# Altium PCB ESP32-HWE.PcbDoc
Units mil, origin at the board's own origin, x right, y up, seen from the top; angles counter-clockwise.
Board outline 1950 x 1185 mil, 2 copper layers (Top Layer, Bottom Layer), stack 61.811 mil thick; 31 components, 46 nets, 217 pads, 31 vias.
Unrouted connection lines stored in the file: 35.
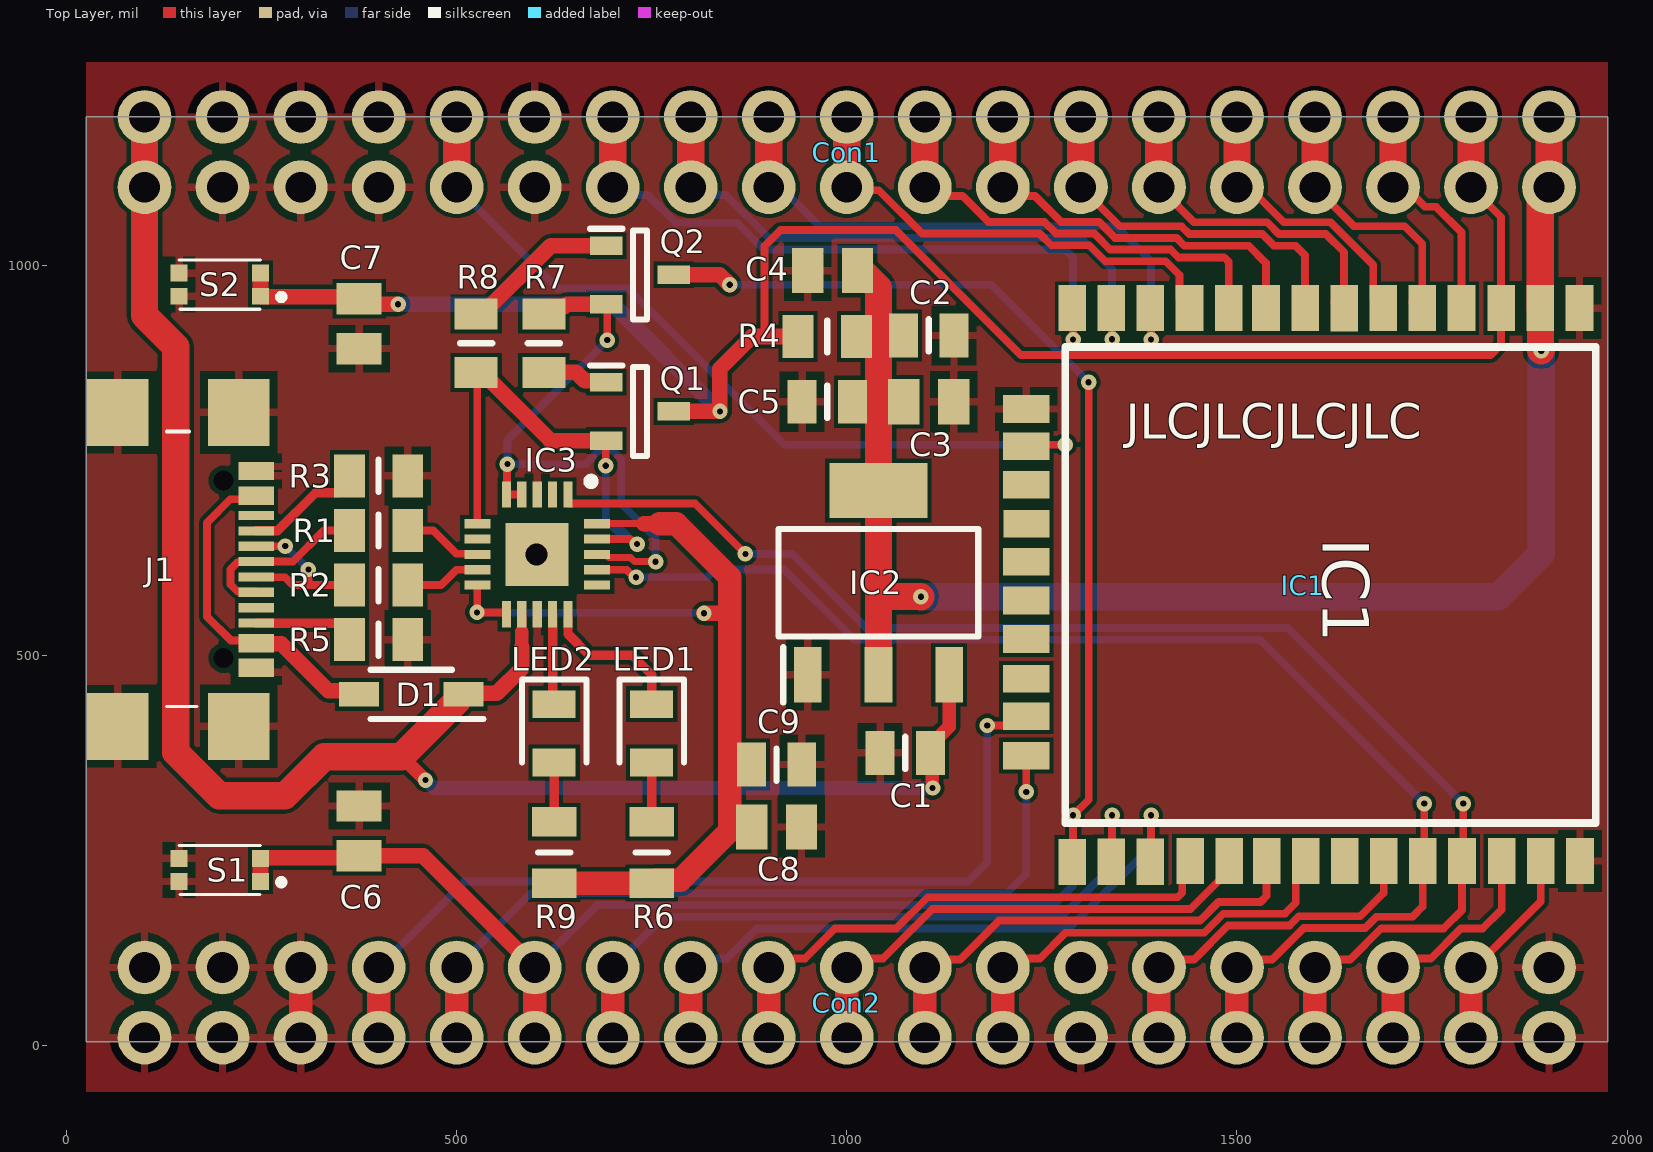
[diagram p0: Top Layer view]
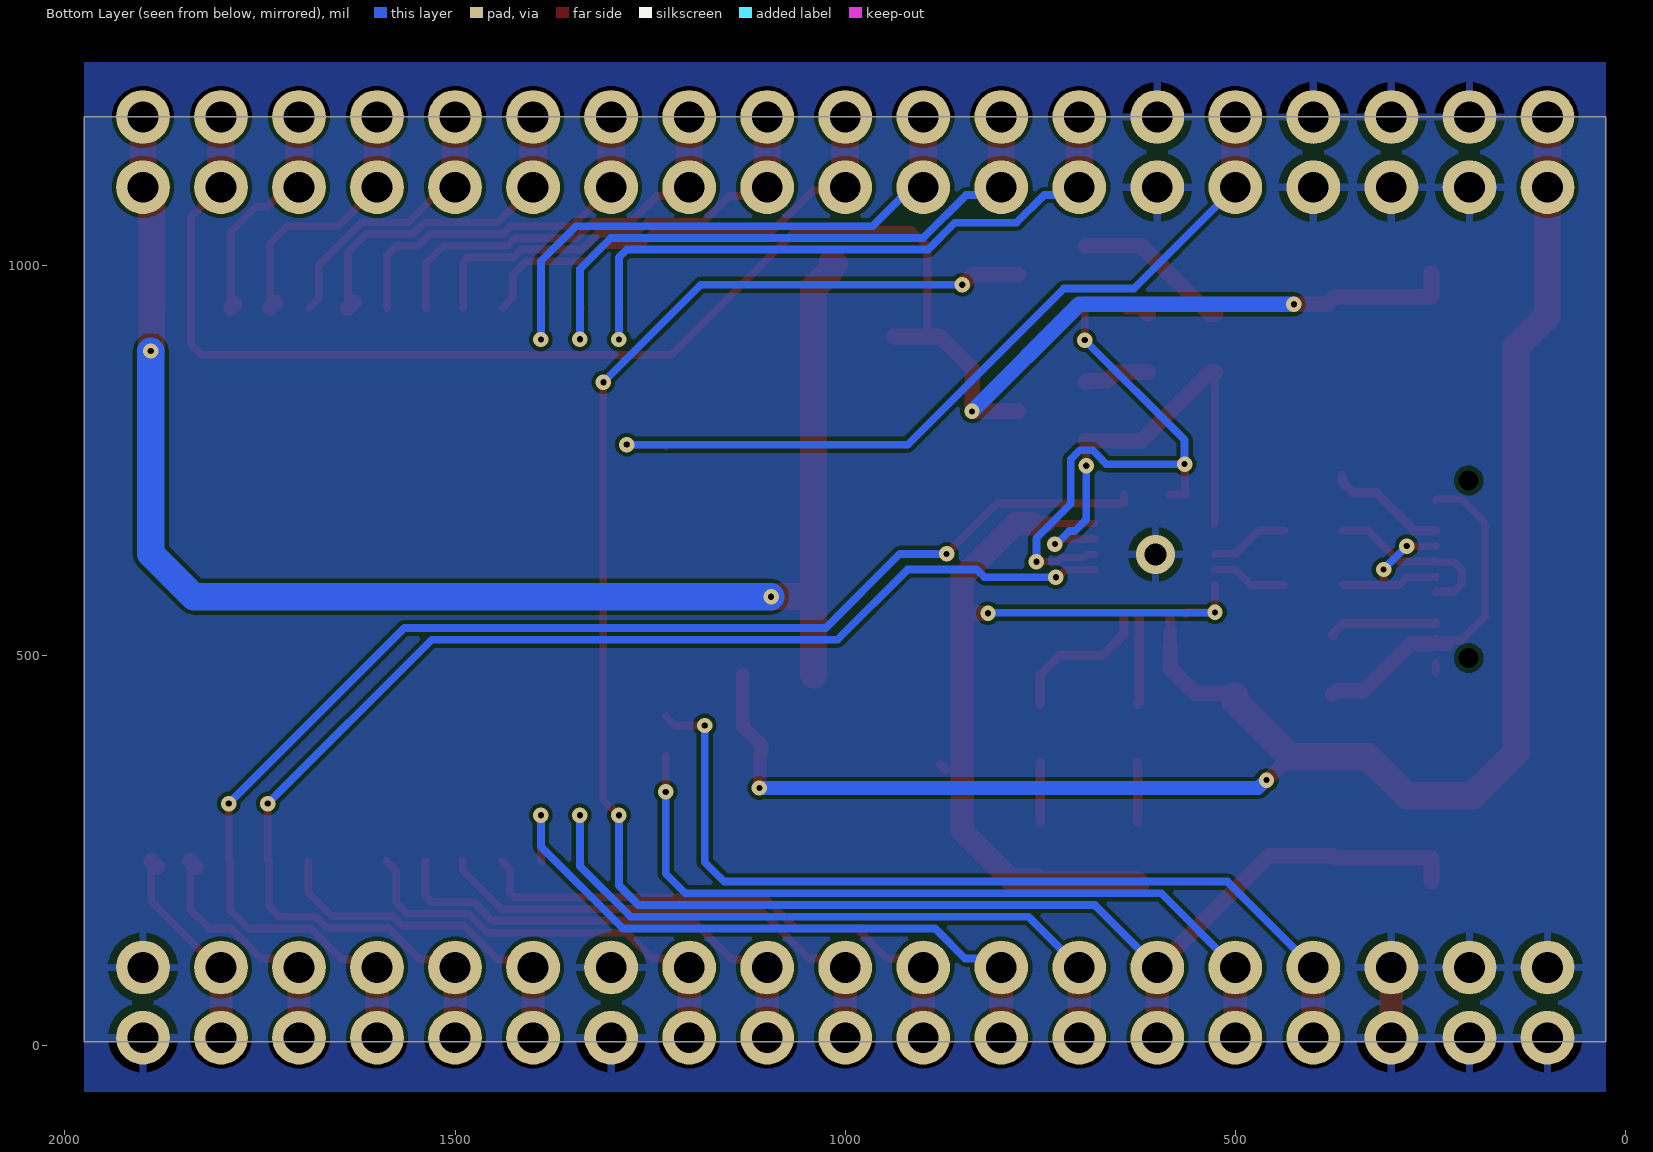
[diagram p1: Bottom Layer view, seen from below]
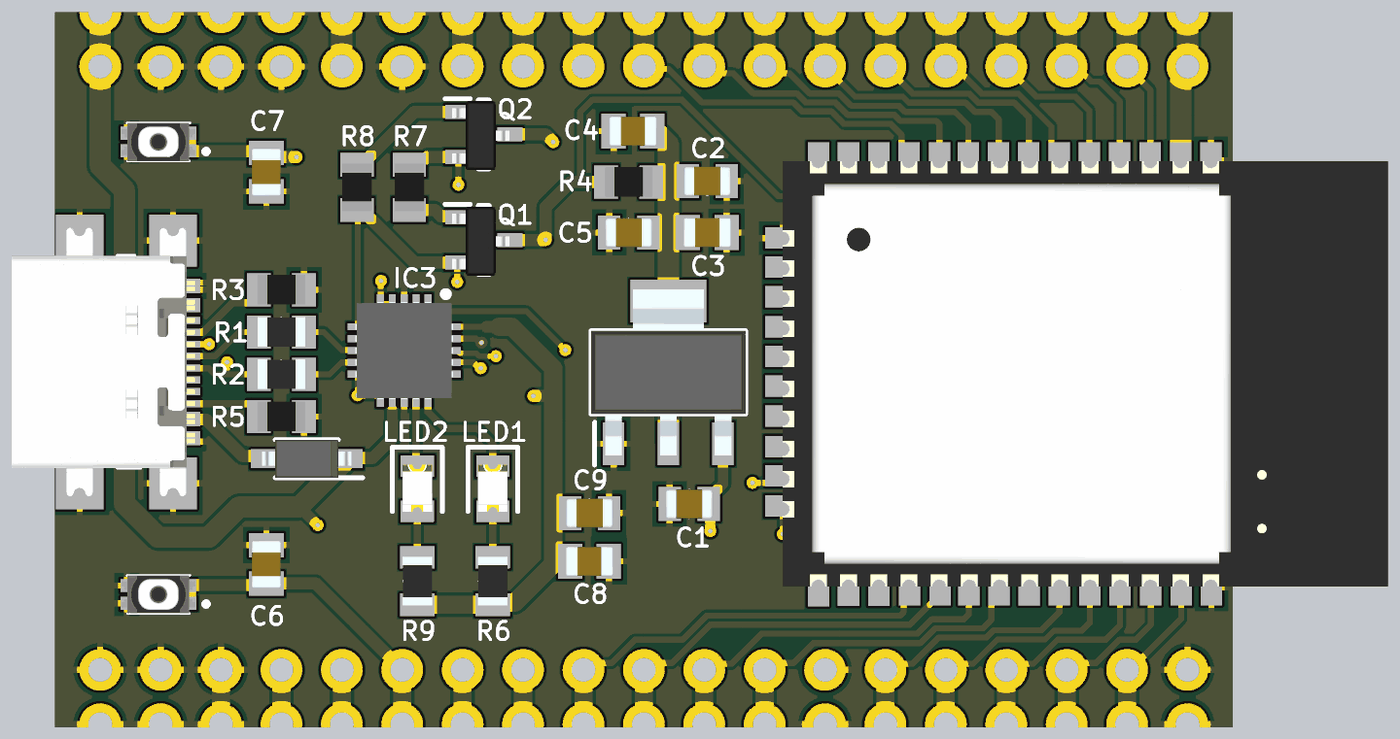
[diagram p2: 3D render of the assembled board from above, using the file's embedded part models]

## Layer stack, top to bottom
Top Solder: solder mask 1, SM-002, Dk 4
Top Layer: signal copper 1.378
Dielectric: core 59.0551, FR-4, Dk 4.5
Bottom Layer: signal copper 1.378
Bottom Solder: solder mask 1, SM-002, Dk 4

## Board outline
25,5 1975,5 1975,1190 25,1190 25,780 25,420

## Design rules (kind name [scope] priority, off if disabled: settings)
Clearance Clearance_1 [All] p1: gap=5 ignorepadtopadclearanceinfootprint=FALSE except(5.91: Arc-Text Arc-Hole Track-Text Track-Hole SMDPad-Text SMDPad-Hole THPad-Text THPad-Hole Via-Text Via-Hole Fill-Text Fill-Hole Poly-Text Poly-Hole Region-Text Region-Hole Text-Text Text-Hole)
Clearance Clearance_D90 [All] p2: gap=0 ignorepadtopadclearanceinfootprint=TRUE
DiffPairsRouting [InDifferentialPair('D')] p1: maxlimit=5 minlimit=5 mostfreqgap=5 toplayer_minwidth=14.4 toplayer_maxwidth=14.4 toplayer_prefwidth=14.4 bottomlayer_minwidth=14.4 bottomlayer_maxwidth=14.4 bottomlayer_prefwidth=14.4 impedanceprofiledriven=TRUE impedanceprofileid={4D5844AF-7548-43E8-93FF-88B9F99C0680} impedanceprofilevalue=90.000000 maxuncoupledlength=500
MinimumSolderMaskSliver [All] p1: minsoldermaskwidth=0
PolygonConnect [All] p1: connectstyle=Relief reliefconductorwidth=10 reliefentries=4 polygonreliefangle="90 Angle" airgapwidth=10
RoutingVias [All] p1: holewidth=7.87 width=19.68 viastyle="Through Hole" minholewidth=7.87 minwidth=19.68 maxholewidth=39.37 maxwidth=78.74
SilkToSilkClearance [All] p1: silktosilkclearance=0
SilkToSolderMaskClearance [IsPad] p1: minsilkscreentomaskgap=0 clearancetoexposedcopper=TRUE
SolderMaskExpansion [All] p1: expansion=4 istentingtop=FALSE
Width [All] p1: maxlimit=50 minlimit=5 preferedwidth=10
26 further rules are at their usual default settings.

## Components (designator, comment, footprint, x,y, rotation, side; value= is the part's Value field where it differs from the comment)
C1 "10uF" CAPC2012X140N 1075,375 r180 top
C2 "10uF" CAPC2012X140N 1105,910 r0 top
C3 "0.1uF" CAPC2012X94N 1105,825 r0 top
C4 "0.1uF" CAPC2012X94N 981.89,993.05 r180 top
C5 "10uF" CAPC2012X140N 975,825 r180 top
C6 "0.1uF" CAPC2012X94N 375,275 r90 top
C7 "0.1uF" CAPC2012X94N 375,925 r270 top
C8 "0.1uF" CAPC2012X94N 910,280 r0 top
C9 "10uF" CAPC2012X140N 910,360 r0 top
Con1 "19Pol" Header_19-Double 100,1190 r270 top
Con2 "19Pol" Header_19-Double 100,100 r270 top
D1 "SS0540_R1_00001" SOD3816X135N 441.93,450 r180 top
IC1 "ESP32" ESP-WRC 1230,945 r270 top locked
IC2 "AP7361C-33ER-13" SOT230P700X180-4N 1040.55,593.11 r90 top
IC3 "FT231XQ-T" QFN50P400X400X80-21N 603.23,629.37 r270 top
J1 "USB4110-GF-A" USB4110GFA 98.43,610.24 r270 top locked
LED1 "150080YS75000" LEDC2012X80N 750,400 r270 top
LED2 "150080YS75000" LEDC2012X80N 625,400 r270 top
Q1 "PMBT3904,235" SOT95P230X110-3N 734.98,812.6 r0 top
Q2 "PMBT3904,235" SOT95P230X110-3N 734.98,987.6 r0 top
R1 "27R" RESC2012X65N 400,660 r180 top
R2 "27R" RESC2012X65N 400,590 r180 top
R3 "5k1" RESC2012X60N 400,730 r0 top
R4 "10k" RESC2012X60N 975,908.63 r180 top
R5 "5k1" RESC2012X60N 400,520 r0 top
R6 "200R" RESC2012X50N 750,247.27 r270 top
R7 "10k" RESC2012X60N 611.78,900 r270 top
R8 "10k" RESC2012X60N 525,900 r90 top
R9 "200R" RESC2012X50N 625,247.27 r90 top
S1 "EVP-BB2A9B000" EVPBB2A9B000 206.3,225 r180 top
S2 "EVP-BB2A9B000" EVPBB2A9B000 206.3,975 r180 top

## Footprints (in the part's own frame and the unit in brackets; to place one, negate y for a bottom-side part, rotate by r counter-clockwise, add the part's x,y. Pads: shape width x height; smd on the part's side, far side on the other; paste and mask are expansions set on the pad)
CAPC2012X94N [mm]
  rect 1.02x1.47 smd: 1(-0.81,0) 2(0.81,0)
  body extent -1,-0.63 1,0.63, height 0.94
CAPC2012X140N [mm]
  rect 0.94x1.43 smd: 1(-0.82,0) 2(0.82,0)
  silkscreen extent 0,-0.53 0,0.53, body extent -1,-0.63 1,0.63, height 1.4
ESP-WRC [mm]
  rect 1.5x0.9 smd: 3V3_1(0,16.733) EN(0,15.458) GND_1(0,18.008) GND_3(18,18.026) IO_00(18.036,1.5) IO_04(18.024,2.764) IO_05(18,6.609) IO_12(0,1.5) IO_14(0,2.764) IO_16(18.024,4.04) IO_17(18,5.333) IO_18(18,7.825) IO_19(18,9.095) IO_21(18,11.635) IO_22(18,15.476) IO_23(18,16.751) IO_25(0,6.59) IO_26(0,5.315) IO_27(0,4.04) IO_32(0,9.076) IO_33(0,7.806) IO_34(0,11.617) IO_35(0.004,10.346) NC(18.004,10.365) RXD0(18,12.91) Sensor_VN(0,12.892) Sensor_VP(0,14.167) TXD0(18,14.185)
  rect 0.9x1.5 smd: GND_2(3.285,0) IO_02(14.57,0) IO_13(4.494,0) IO_15(13.283,0) NC_1(5.752,0) NC_2(7.022,0.003) NC_3(8.255,0) NC_4(9.517,0) NC_5(10.774,0) NC_6(12.065,0)
  silkscreen extent 1.27,1.27 16.76,18.54, body extent 0.05,-0.01 17.95,25.45, height 2.6
EVPBB2A9B000 [mm]
  rect 0.55x0.55 smd: 1(-1.075,0.375) 2(-1.075,-0.375) 3(1.575,-0.375) 4(1.575,0.375)
  silkscreen extent -1.85,-0.8 1.58,0.8, body extent -1.3,-0.8 1.8,0.8, height 0.56
Header_19-Double [mm] "19 Polig"
  round 1.75 hole 1: 1(0,45.72) 1(2.286,45.72) 2(0,43.18) 2(2.286,43.18) 3(0,40.64) 3(2.286,40.64) 4(0,38.1) 4(2.286,38.1) 5(0,35.56) 5(2.286,35.56) 6(0,33.02) 6(2.286,33.02) 7(0,30.48) 7(2.286,30.48) 8(0,27.94) 8(2.286,27.94) 9(0,25.4) 9(2.286,25.4) 10(0,22.86) 10(2.286,22.86) 11(0,20.32) 11(2.286,20.32) 12(0,17.78) 12(2.286,17.78) 13(0,15.24) 13(2.286,15.24) 14(0,12.7) 14(2.286,12.7) 15(0,10.16) 15(2.286,10.16) 16(0,7.62) 16(2.286,7.62) 17(0,5.08) 17(2.286,5.08) 18(0,2.54) 18(2.286,2.54) 19(0,0) 19(2.286,0)
LEDC2012X80N [mm]
  rect 0.9x1.4 smd: 1(-0.95,0) 2(0.95,0)
  silkscreen extent -1.75,-1.05 0.95,1.05, body extent -1.03,-0.63 0.97,0.63, height 0.7
QFN50P400X400X80-21N [mm]
  rect 0.85x0.3 smd: 1(-1.95,1) 2(-1.95,0.5) 3(-1.95,0) 4(-1.95,-0.5) 5(-1.95,-1) 11(1.95,-1) 12(1.95,-0.5) 13(1.95,0) 14(1.95,0.5) 15(1.95,1)
  rect 0.3x0.85 smd: 6(-1,-1.95) 7(-0.5,-1.95) 8(0,-1.95) 9(0.5,-1.95) 10(1,-1.95) 16(1,1.95) 17(0.5,1.95) 18(0,1.95) 19(-0.5,1.95) 20(-1,1.95)
  rect 2.05x2.05 smd: 21(0,0)
  silkscreen extent -2.5,1.63 -2.25,1.88, body extent -2.05,-2.05 2.05,2.05, height 0.8
RESC2012X50N [mm]
  rect 0.95x1.45 smd: 1(-1,0) 2(1,0)
  silkscreen extent 0,-0.53 0,0.53, body extent -1.02,-0.63 1.02,0.63, height 0.5
RESC2012X60N [mm]
  rect 1x1.4 smd: 1(-0.95,0) 2(0.95,0)
  silkscreen extent 0,-0.53 0,0.53, body extent -1,-0.63 1,0.63, height 0.5
RESC2012X65N [mm]
  rect 1x1.4 smd: 1(-0.95,0) 2(0.95,0)
  silkscreen extent 0,-0.53 0,0.53, body extent -1,-0.63 1,0.63, height 0.65
SOD3816X135N [mm]
  rect 1.3x0.8 smd: 1(-1.7,0) 2(1.7,0)
  silkscreen extent -2.35,-0.8 1.33,0.8, body extent -1.88,-0.8 1.88,0.8, height 1.35
SOT95P230X110-3N [mm]
  rect 1.05x0.6 smd: 1(-1.1,0.95) 2(-1.1,-0.95) 3(1.1,0)
  silkscreen extent -1.63,-1.45 0.23,1.5, body extent -1.33,-1.5 1.07,1.4, height 0.95
SOT230P700X180-4N [mm]
  rect 1.8x0.9 smd: 1(-3,2.3) 2(-3,0) 3(-3,-2.3)
  rect 1.8x3.2 smd: 4(3,0)
  silkscreen extent -3.9,-3.25 1.75,3.25, body extent -3.5,-3.25 3.5,3.25, height 1.8
USB4110GFA [mm]
  rect 0.3x1.15 smd: A1(-3.35,3.678) A4(-2.55,3.678) A5(-1.25,3.678) A6(-0.25,3.678) A7(0.25,3.678) A8(1.25,3.678) A9(2.55,3.678) A12(3.35,3.678) B1(3.05,3.678) B4(2.25,3.678) B5(1.75,3.678) B6(0.75,3.678) B7(-0.75,3.678) B8(-1.75,3.678) B9(-2.25,3.678) B12(-3.05,3.678)
  round 0.325 hole 0.65 unplated: MH1(-2.89,2.603) MH2(2.89,2.603)
  rect 2.18x2 smd: MP1(-5.11,-0.827) MP2(5.11,-0.827) MP3(-5.11,3.103) MP4(5.11,3.103)
  silkscreen extent -4.5,0.75 4.47,1.75, body extent -5.65,-3.68 5.65,4.02, height 3.26

## Part data
C1 C2 C5 C9: library part CL21A106KOQNNNG, "Capacitor", Manufacturer_Name="Samsung Electro-Mechanics", Mouser Part Number=187-CL21A106KOQNNNG, Arrow Part Number=CL21A106KOQNNNG, Arrow Price/Stock=https://www.arrow.com/en/products/cl21a106koqnnng/samsung-electro-mechanics?region=nac, Datasheet Link=http://uk.rs-online.com/web/p/products/7665639, Height=1.4mm, Manufacturer_Part_Number=CL21A106KOQNNNG, Mouser Price/Stock=https://www.mouser.co.uk/ProductDetail/Samsung-Electro-Mechanics/CL21A106KOQNNNG?qs=hqM3L16%252BxlcMWI7QbqH0LA%3D%3D
C3 C4 C6 C7 C8: library part 08055C104KAT2A, "Capacitor", Manufacturer_Name=AVX, Mouser Part Number=581-08055C104K, Arrow Part Number=08055C104KAT2A, Arrow Price/Stock=https://www.arrow.com/en/products/08055c104kat2a/avx, Datasheet Link=http://datasheets.avx.com/X7RDielectric.pdf, Height=0.94mm, Manufacturer_Part_Number=08055C104KAT2A, Mouser Price/Stock=https://www.mouser.co.uk/ProductDetail/AVX/08055C104KAT2A?qs=2ujN4bDBNE9mJvapP%252BjopA%3D%3D
Con1 Con2: library part Header_19_Double
D1: "Schottky Diode", Manufacturer_Name=PANJIT, Mouser Part Number=241-SS0540_R1_00001, Datasheet Link=https://www.panjit.com.tw/upload/datasheet/SS0520_SERIES.pdf, Height=1.35mm, Manufacturer_Part_Number=SS0540_R1_00001, Mouser Price/Stock=https://www.mouser.co.uk/ProductDetail/Panjit/SS0540_R1_00001?qs=sPbYRqrBIVn%2F%252BqoXj%2F1rpw%3D%3D
IC1: library part ESP32-WROOM-32E-N16, Manufacturer="Espressif Systems", Category=Uncategorized, Manufacturer Part Number=ESP32-WROOM-32E-N16, Pricing 1="1=3,60000 (USD)", RoHS=No, Stock 1=11805, Supplier 1=Digi-Key
IC2: "Integrated Circuit", Manufacturer_Name="Diodes Inc.", Mouser Part Number=621-AP7361C-33ER-13, Arrow Part Number=AP7361C-33ER-13, Arrow Price/Stock=https://www.arrow.com/en/products/ap7361c-33er-13/diodes-incorporated, Datasheet Link=https://componentsearchengine.com/Datasheets/1/AP7361C-33ER-13.pdf, Height=1.8mm, Manufacturer_Part_Number=AP7361C-33ER-13, Mouser Price/Stock=https://www.mouser.co.uk/ProductDetail/Diodes-Incorporated/AP7361C-33ER-13?qs=60RJRzIpcl8A1pMqYmc7oA%3D%3D
IC3: "Integrated Circuit", Manufacturer_Name="FTDI Chip", Mouser Part Number=895-FT231XQ-T, Arrow Part Number=FT231XQ-T, Arrow Price/Stock=https://www.arrow.com/en/products/ft231xq-t/ftdi-chip?region=nac, Datasheet Link=http://www.ftdichip.com/Support/Documents/DataSheets/ICs/DS_FT231X.pdf, Height=0.8mm, Manufacturer_Part_Number=FT231XQ-T, Mouser Price/Stock=https://www.mouser.co.uk/ProductDetail/FTDI/FT231XQ-T?qs=Gp1Yz1mis3WBwU6V7%2FJOkg%3D%3D
J1: "Connector", Manufacturer_Name="GCT (GLOBAL CONNECTOR TECHNOLOGY)", Mouser Part Number=640-USB4110-GF-A, Datasheet Link=https://gct.co/files/drawings/usb4110.pdf, Height=3.26mm, Manufacturer_Part_Number=USB4110-GF-A, Mouser Price/Stock=https://www.mouser.co.uk/ProductDetail/GCT/USB4110-GF-A?qs=KUoIvG%2F9IlYiZvIXQjyJeA%3D%3D
LED1 LED2: "LED", Manufacturer_Name="Wurth Elektronik", Mouser Part Number=710-150080YS75000, Datasheet Link=https://katalog.we-online.de/led/datasheet/150080YS75000.pdf, Height=0.8mm, Manufacturer_Part_Number=150080YS75000, Mouser Price/Stock=https://www.mouser.co.uk/ProductDetail/Wurth-Elektronik/150080YS75000?qs=LlUlMxKIyB3k0fZGrDMI2w%3D%3D
Q1 Q2: "Transistor BJT NPN", Manufacturer_Name=Nexperia, Mouser Part Number=771-PMBT3904235, Arrow Part Number=PMBT3904,235, Arrow Price/Stock=https://www.arrow.com/en/products/pmbt3904235/nexperia?region=nac, Datasheet Link=https://assets.nexperia.com/documents/data-sheet/PMBT3904.pdf, Height=1.1mm, Manufacturer_Part_Number=PMBT3904,235, Mouser Price/Stock=https://www.mouser.co.uk/ProductDetail/Nexperia/PMBT3904235?qs=LOCUfHb8d9uziIfl4fmvZg%3D%3D
R1 R2: library part SFR10EZPF27R0, "Resistor", Manufacturer_Name="ROHM Semiconductor", Mouser Part Number=755-SFR10EZPF27R0, Datasheet Link=https://fscdn.rohm.com/en/products/databook/datasheet/passive/resistor/chip_resistor/sfr-e.pdf, Height=0.65mm, Manufacturer_Part_Number=SFR10EZPF27R0, Mouser Price/Stock=https://www.mouser.co.uk/ProductDetail/ROHM-Semiconductor/SFR10EZPF27R0?qs=Y0Uzf4wQF3lFQtDGyGx0xw%3D%3D
R3 R5: library part CR0805-JW-512ELF, "Resistor", Manufacturer_Name=Bourns, Mouser Part Number=652-CR0805JW-512ELF, Datasheet Link=https://www.bourns.com/pdfs/chpreztr.pdf, Height=0.6mm, Manufacturer_Part_Number=CR0805-JW-512ELF
R4 R7 R8: library part RC0805FR-1010KL, "Resistor", Manufacturer_Name=KEMET, Mouser Part Number=603-RC0805FR-1010KL, Arrow Part Number=RC0805FR-1010KL, Arrow Price/Stock=https://www.arrow.com/en/products/rc0805fr-1010kl/yageo, Datasheet Link=https://datasheet.datasheetarchive.com/originals/distributors/Datasheets_SAMA/902f9e387b938f871d31120f5fc1d65e.pdf, Height=0.6mm, Manufacturer_Part_Number=RC0805FR-1010KL, Mouser Price/Stock=https://www.mouser.co.uk/ProductDetail/YAGEO/RC0805FR-1010KL?qs=g6xwsc4j%252B%2Fp3VghNFTJwLg%3D%3D
R6 R9: library part CRCW0805200RJNEA, "Resistor", Manufacturer_Name=Vishay, Mouser Part Number=71-CRCW0805200RJNEA, Arrow Part Number=CRCW0805200RJNEA, Arrow Price/Stock=https://www.arrow.com/en/products/crcw0805200rjnea/vishay, Datasheet Link=http://www.vishay.com/docs/20035/dcrcwe3.pdf, Height=0.5mm, Manufacturer_Part_Number=CRCW0805200RJNEA, Mouser Price/Stock=https://www.mouser.co.uk/ProductDetail/Vishay-Dale/CRCW0805200RJNEA?qs=t6Mf8e9K%2FulaYQcj5GyGqg%3D%3D
S1 S2: "Switch", Manufacturer_Name=Panasonic, Mouser Part Number=667-EVP-BB2A9B000, Arrow Part Number=EVP-BB2A9B000, Arrow Price/Stock=https://www.arrow.com/en/products/evp-bb2a9b000/panasonic?region=nac, Datasheet Link=https://industrial.panasonic.com/ac/cdn/e/control/switch/light-touch/catalog/sw_lt_eng_2616s.pdf, Height=0mm, Manufacturer_Part_Number=EVP-BB2A9B000, Mouser Price/Stock=https://www.mouser.co.uk/ProductDetail/Panasonic/EVP-BB2A9B000?qs=iHX4uCgIbgPa3HqgzZ6vLw%3D%3D

## Via types
v1: diameter 19.68, hole 7.87, Top Layer to Bottom Layer, 30 vias
v2: diameter 50, hole 28, Top Layer to Bottom Layer, 1 vias

## Nets (pads, with @x,y where several pads share a name; then routed paths per layer and width w, separated by ;. In a path a pad name is that pad's centre, name@x,y a point inside that pad or via, vN(x,y) a via of type N, cw(c..) or ccw(c..) an arc to the next point about the centre after c; other vN are vias at no path point)
3V3-USB: C8.1 C9.1 IC3.10 IC3.11 IC3.20 R6.2 R9.1 | length 1183.5
  Top Layer w9: IC3.20 738.74,668.74
  Top Layer w10: v1(526,555) v1@526.46,555 ; IC3.10 v1@526.46,555 ; IC3.11 563.86,554.09 562.95,555 v1@526.46,555 ; 848.83,554 850,555.17
  Top Layer w12: C9.1@871.46,353.74 C9.1
  Top Layer w20: 740,668.74 760,668.74 ; v1(817,554) 848.83,554
  Top Layer w30: R9.1 R6.2 753.7,211.6 786.6,211.6 850,275 850,555.17 850,600 781.26,668.74 760,668.74
  Bottom Layer w10: v1(526,555) 526.5,554.5 816.5,554.5 v1(817,554)
+3V3: C2.1 C3.1 C4.1 C5.1 Con1.1 IC1.3V3_1 IC2.2 IC2.4 R4.1 | length 1965.1
  Top Layer w35: C4.1@1013.78,1001.91 C4.1@1016.36,1004.49 ; C4.1@1020.75,990.75 1040.55,970.94 1040.55,910 IC2.4 1040.55,575.34 ; IC2.2 1040.55,575.34 ; v1(1095,575) 1094.66,575.34 1040.55,575.34 ; v1(1890,890) 1888.99,891.01 1888.99,944.78 IC1.3V3_1 1888.77,1079.6 1900,1090.83 1900,1100 Con1.1@1900,1190
  Bottom Layer w35: v1(1095,575) 1835,575 1890,630 v1(1890,890)
+5: C1.1 Con1.19 D1.1 IC2.3 IC3.12 | length 2283
  Top Layer w12: 583.54,530 IC3.12
  Top Layer w17.5: 428.86,370 430,370 v1(460,340) ; 583.54,510 583.54,530 ; v1(1110,330) 1109.58,330.42 1109.58,372.7 C1.1 1107.28,384.65 1131.1,408.46 IC2.3
  Top Layer w20: D1.1 510.17,451.31 551.31,451.31 583.54,483.54 583.54,510
  Top Layer w35: Con1.19@100,1190 100,1100 100,935.41 140,895.41 140,375.54 195.54,320 280,320 330,370 428.86,370 500.77,441.91 D1.1@500.77,448.25
  Bottom Layer w17.5: v1(460,340) 460.59,340 470.59,330 v1(1110,330)
+5-USB: D1.2 J1.A4 J1.A9 J1.B4 J1.B9 | length 450.5
  Top Layer w10: 210,700 180,670 180,549.6 210.7,518.9 240.08,518.9 J1.B4@243.23,515.75 ; 210.28,700 242.05,700 J1.B9 ; J1.A9@225.59,510.75 242.32,510.75 J1.A9
  Top Layer w20: J1.B4@243.23,515.75 243.98,515 275.05,515 335.64,454.41 370.59,454.41 D1.2
GND: C1.2 C2.2 C3.2 C4.2 C5.2 C6.2 C7.2 C8.2 C9.2 Con1.14 Con1.16 Con1.17 Con1.18 Con2.1 Con2.7 Con2.17 Con2.18 Con2.19 IC1.GND_1 IC1.GND_2 IC1.GND_3 IC2.1 IC3.3 IC3.13 IC3.21 J1.A1 J1.A12 J1.B1 J1.B12 J1.MP1 J1.MP2 J1.MP3 J1.MP4 R3.2 R5.2 S1.3 S1.4 S2.3 S2.4 | length 101.8
  Top Layer w10: J1.A12 J1.B1
  Top Layer w30: Con2.17@300,10 Con2.17@300,100
  other v2: 602.23,629.37
NetC6_1: C6.1 Con2.14 IC1.IO_00 Q2.3 S1.1 S1.2 | length 2567.5
  Top Layer w10: IC1.IO_00 1290,235.85 v1(1290,295) 1310,315 v1(1310,850)
  Top Layer w20: S1.1 S1.2 249.45,240.59 372.48,240.59 C6.1 456.89,243.11 Con2.14@600,100 ; Q2.3 837.4,987.6 v1(850,975)
  Top Layer w30: Con2.14@600,10 Con2.14@600,100
  Bottom Layer w10: Con2.14@600,100 680,180 1265,180 1290,205 v1(1290,295) ; v1(850,975) 1185,975 v1(1310,850)
NetC7_1: C7.1 Con1.2 IC1.EN Q1.3 R4.2 S2.1 S2.2 | length 2358.4
  Top Layer w10: 894.48,908.63 894.48,1024.48 915,1045 1063.08,1045 1223.08,885 1825,885 1838.58,898.58 IC1.EN 1838.58,1061.42 Con1.2@1800,1100
  Top Layer w20: S2.2 S2.1 249.45,959.41 372.48,959.41 C7.1 381.89,950 v1(425,950) ; Q1.3 v1(837.4,812.6) 837.4,867.4 878.63,908.63 894.48,908.63 R4.2
  Top Layer w35: Con1.2@1800,1100 Con1.2@1800,1190
  Bottom Layer w20: v1(425,950) 700,950 v1(837.4,812.6)
NetCon1_3: Con1.3 IC1.Sensor_VP | length 306.7
  Top Layer w10: Con1.3@1700,1100 1715.94,1100 1740.94,1075 1755,1075 1787.75,1042.25 IC1.Sensor_VP
  Top Layer w20: IC1.Sensor_VP@1782.24,950.51 IC1.Sensor_VP
  Top Layer w35: Con1.3@1700,1100 Con1.3@1700,1190
NetCon1_4: Con1.4 IC1.Sensor_VN | length 351
  Top Layer w10: Con1.4@1600,1100 1650,1050 1715,1050 1737.56,1027.44 IC1.Sensor_VN
  Top Layer w20: IC1.Sensor_VN@1729.84,952.72 IC1.Sensor_VN
  Top Layer w35: Con1.4@1600,1100 Con1.4@1600,1190
NetCon1_5: Con1.5 IC1.IO_34 | length 366.5
  Top Layer w10: Con1.5@1500,1100 1515,1100 1560,1055 1620,1055 1674.65,1000.35 1674.65,957.72 IC1.IO_34
  Top Layer w35: Con1.5@1500,1100 Con1.5@1500,1190
NetCon1_6: Con1.6 IC1.IO_35 | length 444.5
  Top Layer w10: Con1.6@1400,1100 1445,1055 1538.79,1055 1553.79,1040 1613.79,1040 1637.34,1016.45 1637.34,952.55 IC1.IO_35
  Top Layer w20: IC1.IO_35@1629.62,952.55 IC1.IO_35
  Top Layer w35: Con1.6@1400,1100 Con1.6@1400,1190
NetCon1_7: Con1.7 IC1.IO_32 | length 481.2
  Top Layer w10: Con1.7@1300,1100 1350,1050 1428.79,1050 1438.79,1040 1532.57,1040 1547.57,1025 1575,1025 1587.34,1012.66 IC1.IO_32
  Top Layer w35: Con1.7@1300,1100 Con1.7@1300,1190
NetCon1_8: Con1.8 IC1.IO_33 | length 525.3
  Top Layer w10: Con1.8@1200,1100 1211.27,1088.73 1241.27,1088.73 1274.45,1055.55 1323.24,1055.55 1343.79,1035 1422.57,1035 1432.57,1025 1515,1025 1537.34,1002.66 IC1.IO_33
  Top Layer w35: Con1.8@1200,1100 Con1.8@1200,1190
NetCon1_9: Con1.9 IC1.IO_25 | length 578.3
  Top Layer w10: Con1.9@1100,1100 1111.27,1088.73 1148.41,1088.73 1181.59,1055.55 1253.24,1055.55 1268.24,1040.55 1317.02,1040.55 1337.57,1020 1415,1020 1425,1010 1483.6,1010 1489.46,1004.14 IC1.IO_25
  Top Layer w35: Con1.9@1100,1100 Con1.9@1100,1190
NetCon1_10: Con1.10 IC1.IO_26 | length 610.8
  Top Layer w10: Con1.10@1000,1100 1003.93,1096.07 1041.07,1096.07 1096.59,1040.55 1247.02,1040.55 1262.02,1025.55 1310.81,1025.55 1331.36,1005 1408.79,1005 1426.53,987.25 1426.53,957.72 IC1.IO_26
  Top Layer w35: Con1.10@1000,1100 Con1.10@1000,1190
NetCon1_11: Con1.11 IC1.IO_27 | length 760.1
  Top Layer w10: IC1.IO_27 1390,944.04 v1(1390,904.84)
  Top Layer w35: Con1.11@900,1100 Con1.11@900,1190
  Bottom Layer w10: Con1.11@900,1100 915,1100 965,1050 1345,1050 1390,1005 v1(1390,904.84)
NetCon1_12: Con1.12 IC1.IO_14 | length 804
  Top Layer w10: IC1.IO_14 1340,943.83 v1(1340,905)
  Top Layer w35: Con1.12@800,1100 Con1.12@800,1190
  Bottom Layer w10: Con1.12@800,1100 810,1090 845,1090 900,1035 1300,1035 1340,995 v1(1340,905)
NetCon1_13: Con1.13 IC1.IO_12 | length 863
  Top Layer w10: IC1.IO_12 1290,944.06 v1(1290,904.84)
  Top Layer w35: Con1.13@700,1100 Con1.13@700,1190
  Bottom Layer w10: Con1.13@700,1100 710,1090 745,1090 780.61,1054.39 859.39,1054.39 893.79,1020 1280,1020 1290,1010 v1(1290,904.84)
NetCon1_15: Con1.15 IC1.IO_13 | length 1057.5
  Top Layer w10: IC1.IO_13 1231.95,770 v1(1280,770)
  Top Layer w35: Con1.15@500,1100 Con1.15@500,1190
  Bottom Layer w10: Con1.15@500,1100 630,970 720,970 920,770 v1(1280,770)
NetCon2_2: Con2.2 IC1.IO_23 | length 277.2
  Top Layer w10: Con2.2@1800,100 1805,100 1889.49,184.49 IC1.IO_23
  Top Layer w20: IC1.IO_23@1881.77,228.62 IC1.IO_23
  Top Layer w30: Con2.2@1800,10 Con2.2@1800,100
NetCon2_3: Con2.3 IC1.IO_22 | length 321.2
  Top Layer w10: Con2.3@1700,100 1711.27,111.27 1748.41,111.27 1787.19,150.05 1815.05,150.05 1839.3,174.3 IC1.IO_22@1839.3,224.53
  Top Layer w20: IC1.IO_22@1831.58,228.62 IC1.IO_22
  Top Layer w30: Con2.3@1700,10 Con2.3@1700,100
NetCon2_4: Con2.4 IC1.TXD0 IC3.1 | length 1763.9
  Top Layer w10: IC3.1 642.6,695.32 643.5,694.41 805.59,694.41 v1(870,630) ; Con2.4@1600,100 1610,110 1645,110 1685,150 1765,150 1788.47,173.47 IC1.TXD0 1790,237.87 v1(1790,310)
  Top Layer w30: Con2.4@1600,10 Con2.4@1600,100
  Bottom Layer w10: v1(870,630) 930,630 1025,535 1565,535 v1(1790,310)
NetCon2_5: Con2.5 IC1.RXD0 IC3.17 | length 1685.6
  Top Layer w10: IC3.17 680.08,609.76 717.62,609.76 727.38,600 v1(730,600) ; Con2.5@1500,100 1510,110 1545,110 1585.61,150.61 1664.39,150.61 1678.79,165 1725,165 1738.28,178.28 IC1.RXD0 1740,238.06 v1(1740,310)
  Top Layer w30: Con2.5@1500,10 Con2.5@1500,100
  Bottom Layer w10: v1(730,600) 821.31,600 831.31,610 920,610 1010,520 1530,520 v1(1740,310)
NetCon2_6: Con2.6 IC1.IO_21 | length 458.5
  Top Layer w10: Con2.6@1400,100 1410,110 1445,110 1488.88,153.88 1567.66,153.88 1579.39,165.61 1658.18,165.61 1688.09,195.51 IC1.IO_21
  Top Layer w30: Con2.6@1400,10 Con2.6@1400,100
NetCon2_8: Con2.8 IC1.IO_19 | length 558.5
  Top Layer w10: Con2.8@1200,100 1211.27,111.27 1247.21,111.27 1280.39,144.45 1458.24,144.45 1482.66,168.88 1561.45,168.88 1575.34,182.77 1575.34,223.62 IC1.IO_19
  Top Layer w30: Con2.8@1200,10 Con2.8@1200,100
NetCon2_9: Con2.9 IC1.IO_18 | length 610.6
  Top Layer w10: Con2.9@1100,100 1110,110 1145,110 1195,160 1452.57,160 1476.45,183.88 1530.12,183.88 1538.05,191.81 IC1.IO_18
  Top Layer w30: Con2.9@1100,10 Con2.9@1100,100
NetCon2_10: Con2.10 IC1.IO_05 | length 643.6
  Top Layer w10: Con2.10@1000,100 1011.27,111.27 1046.27,111.27 1110,175 1440.65,175 1490.18,224.53 IC1.IO_05
  Top Layer w30: Con2.10@1000,10 Con2.10@1000,100
NetCon2_11: Con2.11 IC1.IO_17 | length 704.3
  Top Layer w10: Con2.11@900,100 911.27,111.27 946.27,111.27 985,150 1063.79,150 1103.79,190 1424.14,190 1430,195.86 1430,226.37 IC1.IO_17
  Top Layer w30: Con2.11@900,10 Con2.11@900,100
NetCon2_12: Con2.12 IC1.IO_16 | length 844.2
  Top Layer w10: IC1.IO_16 1390,236.36 v1(1390,295)
  Top Layer w30: Con2.12@800,10 Con2.12@800,100
  Bottom Layer w10: Con2.12@800,100 811.27,111.27 846.27,111.27 885,150 1285,150 1390,255 v1(1390,295)
NetCon2_13: Con2.13 IC1.IO_04 | length 908.9
  Top Layer w10: IC1.IO_04 1340,236.58 v1(1340,295)
  Top Layer w30: Con2.13@700,10 Con2.13@700,100
  Bottom Layer w10: Con2.13@700,100 765,165 1275,165 1340,230 v1(1340,295)
NetCon2_15: Con2.15 IC1.IO_02 | length 1021.1
  Top Layer w10: v1(1230,325) IC1.IO_02
  Top Layer w30: Con2.15@500,10 Con2.15@500,100
  Bottom Layer w10: Con2.15@500,100 595,195 1205,195 1230,220 v1(1230,325)
NetCon2_16: Con2.16 IC1.IO_15 | length 1155.9
  Top Layer w10: v1(1180,410) 1217.97,410 IC1.IO_15
  Top Layer w30: Con2.16@400,10 Con2.16@400,100
  Bottom Layer w10: Con2.16@400,100 510,210 1155,210 1180,235 v1(1180,410)
NetIC3_4: IC3.4 IC3.5 IC3.18 Q2.2 R7.1 | length 789.6
  Top Layer w9: IC3.18 690.83,629.37 695.11,625.09 722.79,625.09 727.88,620 v1(755,620)
  Top Layer w10: v1(565,745) 564.43,744.43 564.43,706.71 IC3.5 IC3.4 ; Q2.2 693,948.87 v1(693,904)
  Top Layer w20: R7.1 621.47,947.09 637.95,947.09 641.06,950.2 Q2.2
  Bottom Layer w10: v1(693,904) 565,776 v1(565,745) 660,745 665.3,745 671.16,750.86 671.16,751.22 682.78,762.84 699.22,762.84 710.84,751.22 710.84,694.16 755,650 v1(755,620)
NetIC3_6: IC3.6 IC3.19 Q1.2 R8.1 | length 606
  Top Layer w10: R8.1 526.46,861.14 IC3.6 ; IC3.19 722.07,649.03 728.59,642.51 v1(731.21,642.51) ; v1(691,743) 691,774.52 Q1.2
  Top Layer w20: R8.1 532.87,862.6 620.28,775.2 Q1.2
  Bottom Layer w10: v1(691,743) 691,674 705.82,659.18 712.75,659.18 729.43,642.51 v1(731.21,642.51)
NetIC3_8: IC3.8 R1.1 | length 101.7
  Top Layer w10: R1.1 470,660 499.72,630.28 525.55,630.28 IC3.8
NetIC3_9: IC3.9 R2.1 | length 97.2
  Top Layer w10: R2.1 480,590 499.69,609.69 IC3.9
NetIC3_14: IC3.14 LED2.1 | length 116.1
  Top Layer w12: IC3.14 622.91,439.49 LED2.1
NetIC3_15: IC3.15 LED1.1 | length 191.9
  Top Layer w12: IC3.15 642.6,527.4 670,500 725,500 750,475 LED1.1
NetJ1_A5: J1.A5 R3.1 | length 153.2
  Top Layer w12: J1.A5 243.32,659.54 270.44,659.54 319.34,708.44 348.91,708.44 362.6,722.13 R3.1
NetJ1_A6: J1.A6 J1.B6 R1.2 | length 229.8
  Top Layer w10: J1.B6 242.32,581.61 219.32,581.61 210,590.94 210,610 219.17,619.17 242.32,619.17 J1.A6 290.08,620.08 330,660 R1.2
NetJ1_A7: J1.A7 J1.B7 R2.2 | length 223.1
  Top Layer w10: J1.A7 243.62,600 280,600 290,590 310.06,590 ; J1.B7 243.31,639.84 280.22,639.84 v1(280.29,639.92) ; v1(310,610) 310,590.06 310.06,590 ; R2.2 310.06,590
  Bottom Layer w10: v1(280.29,639.92) 280.29,639.81 310,610.11 v1(310,610)
NetJ1_B5: J1.B5 R5.1 | length 140.1
  Top Layer w12: J1.B5 361.31,541.34 375,527.65 R5.1@375,525
NetLED1_2: LED1.2 R6.1 | length 76
  Top Layer w12: R6.1 LED1.2
NetLED2_2: LED2.2 R9.2 | length 76
  Top Layer w12: R9.2 LED2.2
NetQ1_1: Q1.1 R7.2 | length 85.1
  Top Layer w20: R7.2 653.29,862.6 664.08,851.81 689.86,851.81 Q1.1
NetQ2_1: Q2.1 R8.2 | length 203
  Top Layer w20: R8.2 532.87,937.4 620.47,1025 Q2.1
pads on no net: IC1.NC IC1.NC_1 IC1.NC_2 IC1.NC_3 IC1.NC_4 IC1.NC_5 IC1.NC_6 IC3.2 IC3.7 IC3.16 J1.A8 J1.B8 J1.MH1 J1.MH2

## Polygon pours and split planes (outlines as drawn)
GND on Top Layer "GND_L01_P001" (solid, pour order 1): 25,-59.06 25,1259.84 1975,1259.84 1975,-59.06
GND on Bottom Layer "GND_L02_P000" (solid, pour order 0): 25,-59.06 25,1259.84 1975,1259.84 1975,-59.06

## Silkscreen, mask and mechanical layers (free items; w line width, h text height)
Board Layer Stack Top Overlay:
  text "JLCJLCJLCJLC" at 1357.5,777.5 h45